# EAGLE board LaunchPadSpiBus (EAGLE 6.4)
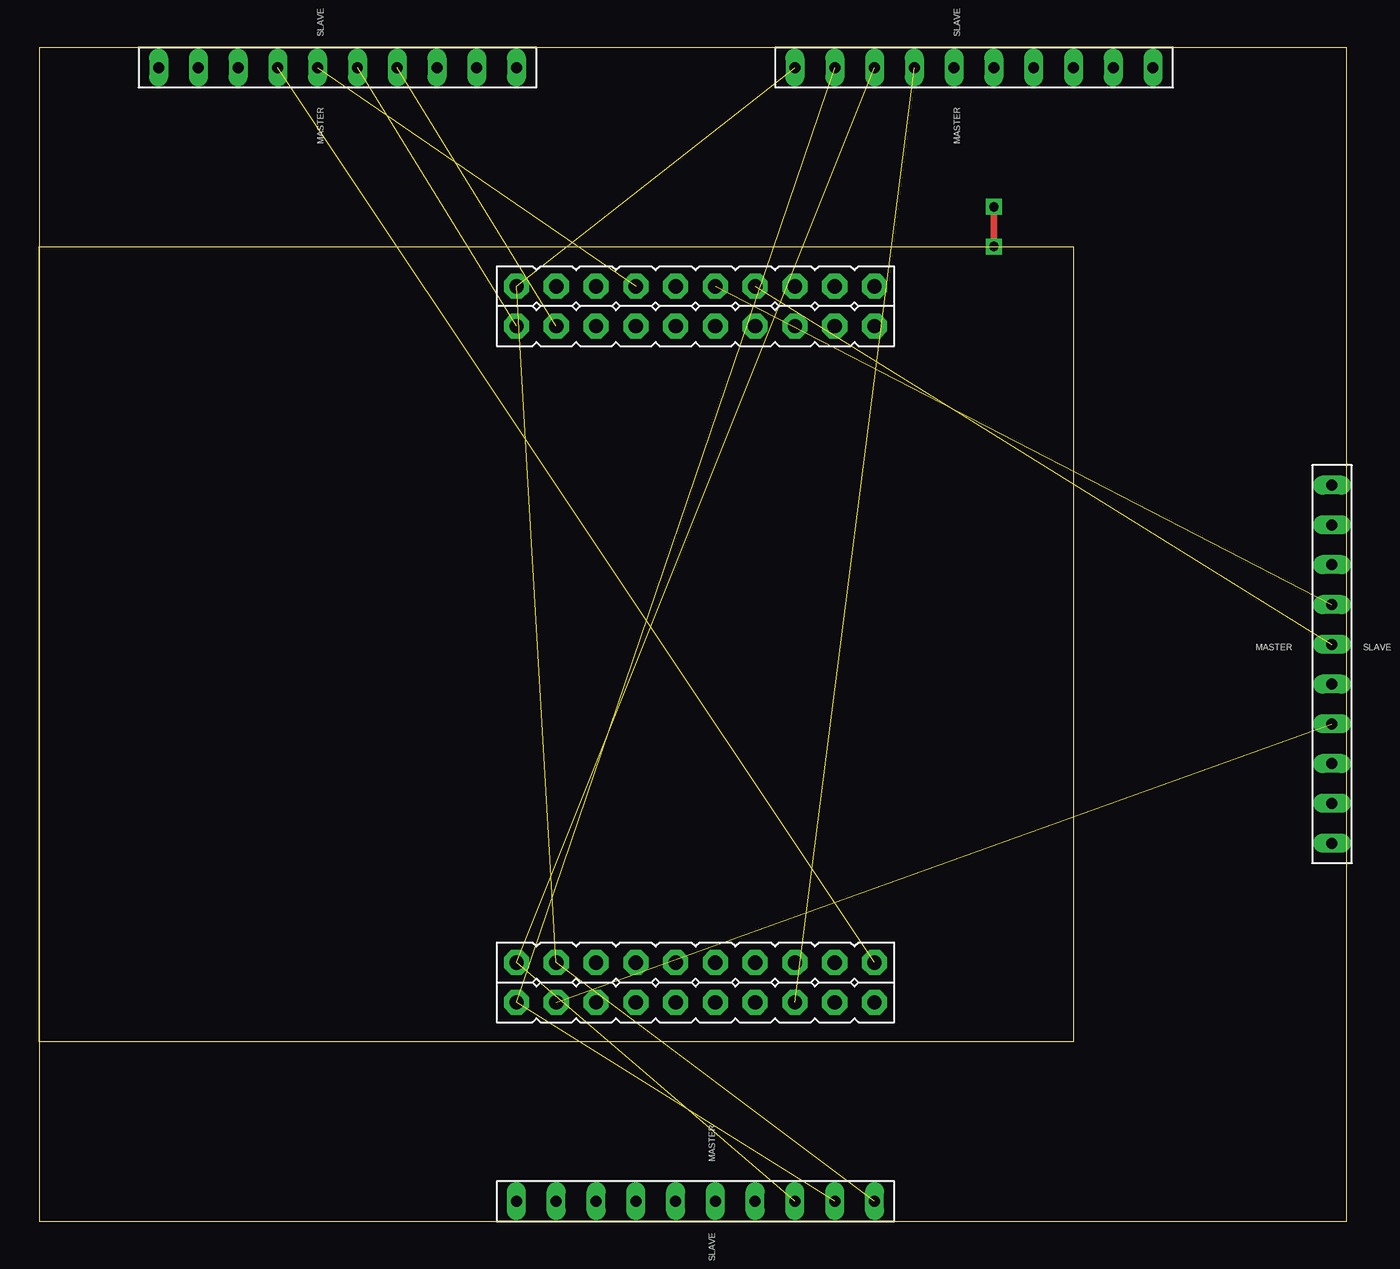
[diagram p0: board, top side]
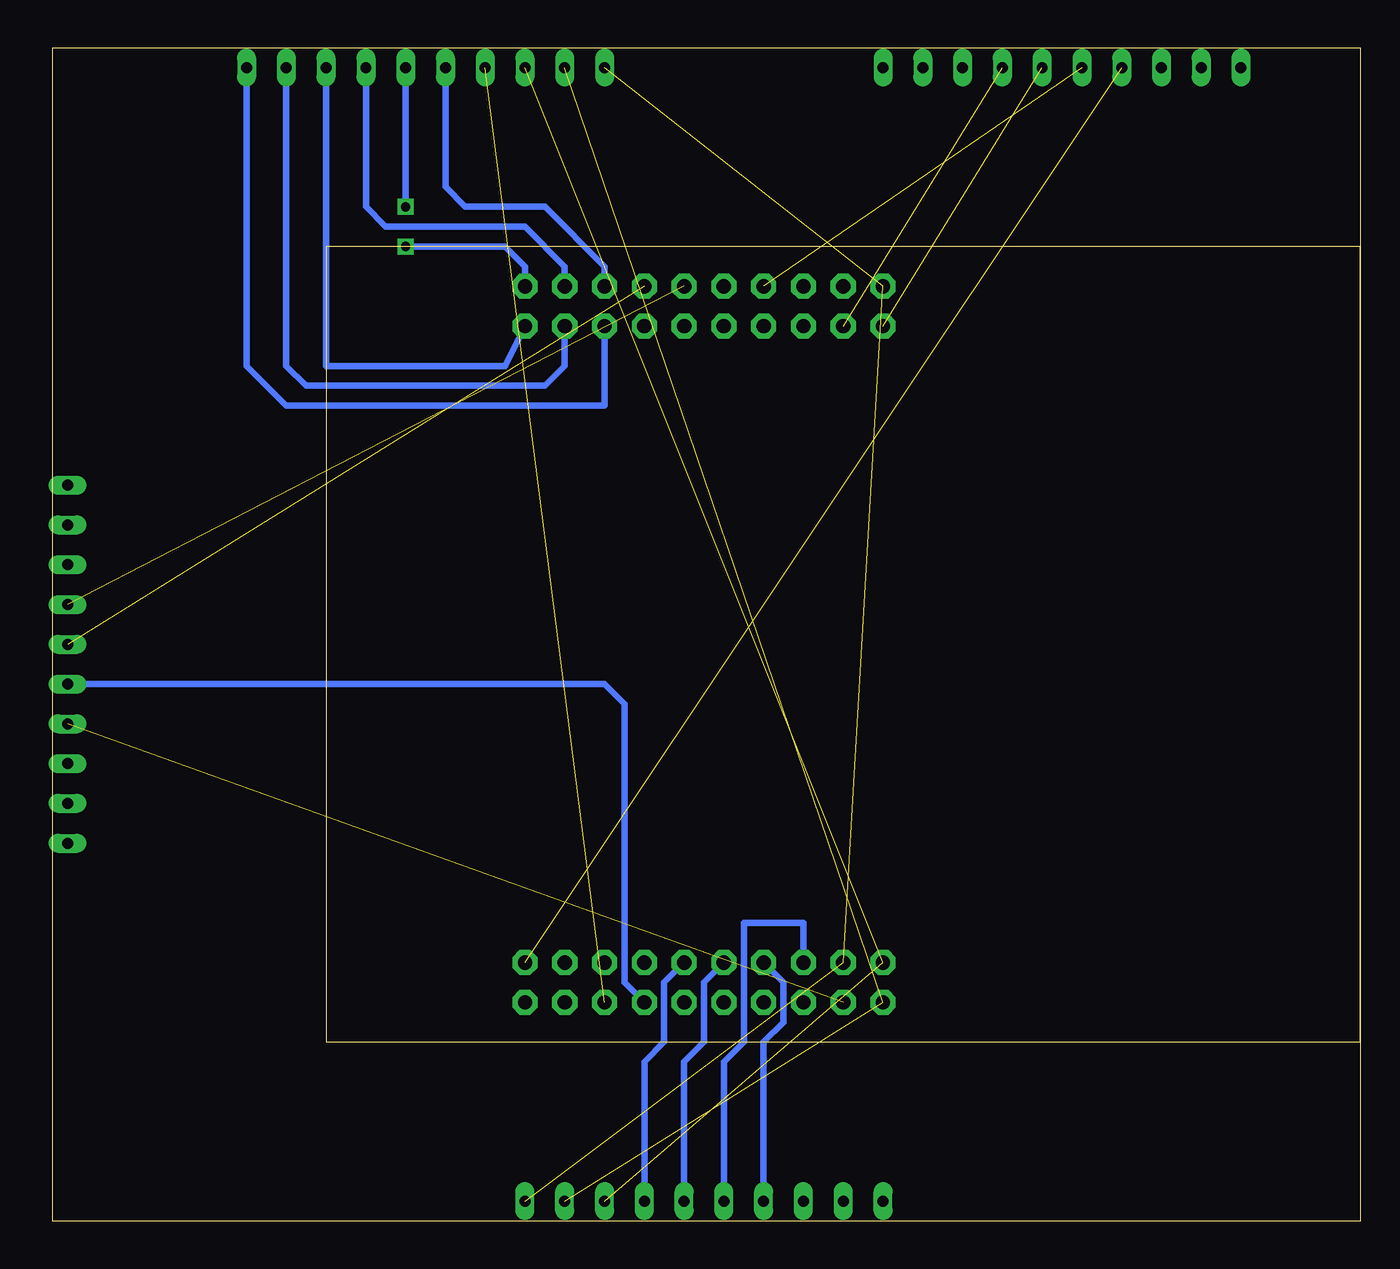
[diagram p1: board, bottom side, seen from below]

Size 83.49 x 74.92 mm. Coordinates in mm from the lower left corner, seen from the top.
Outline: 0,0 83.49,0 83.49,74.92 0,74.92 0,0
Copper layers (1*16): Top 0.035mm / dielectric 1.5mm / Bottom 0.035mm
Design rules "default": minimum track width 10mil, minimum drill 24mil, track to track 8mil, track to pad 8mil, pad to pad 8mil, via to via 8mil, smd to smd 8mil, copper to edge 40mil, drill to drill 8mil, minimum pad ring 10mil, minimum via ring 8mil, stop-mask expansion 4mil, vias tented up to drill 0mil, thermal gap 10mil

## Footprints (pad centres in the part's own frame; a part is rotated, then mirrored left to right if it is on the bottom)
LAUNCHPAD-XL = drill 0.914 pad 1.6 octagon: 3.3V 30.48,2.54; GND1 33.02,5.08; GND2 30.48,48.26; PA2 53.34,48.26; PA3 50.8,48.26; PA4 48.26,48.26; PA5 48.26,2.54; PA6 50.8,2.54; PA7 53.34,2.54; PB0 35.56,2.54; PB1 38.1,2.54; PB2 33.02,48.26; PB3 35.56,45.72; PB4 45.72,2.54; PB5 33.02,2.54; PB6 45.72,48.26; PB7 43.18,48.26; PC4 38.1,45.72; PC5 40.64,45.72; PC6 43.18,45.72; PC7 45.72,45.72; PD0 35.56,5.08; PD1 38.1,5.08; PD2 40.64,5.08; PD3 43.18,5.08; PD6 48.26,45.72; PD7 50.8,45.72; PE0 35.56,48.26; PE1 45.72,5.08; PE2 48.26,5.08; PE3 50.8,5.08; PE4 40.64,2.54; PE5 43.18,2.54; PF0 38.1,48.26; PF1 53.34,5.08; PF2 30.48,45.72; PF3 33.02,45.72; PF4 53.34,45.72; RST 40.64,48.26; VBUS 30.48,5.08
SPI_BUS = drill 0.7 long: +3V3 0,2.54; +5V 0,5.08; CS 0,15.24; GND 0,0; GPIO 0,22.86; INT 0,17.78; MISO 0,10.16; MOSI 0,7.62; RST 0,20.32; SCK 0,12.7

## Placement (x,y rotation side)
U$1  STELLARIS-LAUNCHPADSTELLARIS-LAUNCHPAD-XL  [LAUNCHPAD-XL]  0,11.43 0 top
U$2  SPI_BUS  [SPI_BUS]  48.26,73.66 270 top
U$3  SPI_BUS  [SPI_BUS]  53.34,1.27 90 top
U$4  SPI_BUS  [SPI_BUS]  7.62,73.66 270 top
U$5  SPI_BUS  [SPI_BUS]  82.55,46.99 180 top

## Library data of the parts
U$1 = StellarisLaunchPad_Fred
U$2-U$5 = lieven

## Nets
N$1: U$1.PA3 U$2.CS
N$2: U$1.PE4
N$3: U$1.PB0
N$4: U$1.PB1
N$5: U$1.PD0 U$3.SCK
N$6: U$1.PD1 U$3.CS
N$7: U$1.VBUS U$2.+5V U$3.+5V
N$8: U$1.PA2 U$2.SCK
N$9: U$1.GND1 U$1.GND2 U$2.GND U$3.GND
N$10: U$1.3.3V U$2.+3V3 U$3.+3V3
N$11: U$1.PB5 U$5.CS
N$12: U$1.PA5 U$2.MOSI
N$13: U$1.PE0
N$14: U$1.PB4 U$5.SCK
N$15: U$1.PB7 U$5.MOSI
N$16: U$1.PB6 U$5.MISO
N$17: U$1.PA4 U$2.MISO
N$18: U$1.PF4 U$2.INT
N$19: U$1.PD7 U$2.RST
N$20: U$1.PD6 U$2.GPIO
N$21: U$1.PD2 U$3.MISO
N$22: U$1.PD3 U$3.MOSI
N$23: U$1.PF1 U$4.MOSI
N$24: U$1.PF0 U$4.MISO
N$25: U$1.PF2 U$4.SCK
N$26: U$1.PF3 U$4.CS
RST: U$1.RST

## Tracks (layer width: path | path; a pad name or v marks a point on that pad's centre or on a via)
N$1
  Bottom 0.406: U$1.PA3 50.8,60.96 53.34,63.5 62.23,63.5 63.5,64.77 U$2.CS
N$5
  Bottom 0.406: U$3.SCK 40.64,10.16 39.37,11.43 39.37,19.05 35.56,19.05 U$1.PD0
N$6
  Bottom 0.406: U$3.CS 38.1,11.43 36.83,12.7 36.83,15.24 U$1.PD1
N$7  (2 unrouted)
N$8  (via drill 0.6)
  Top 0.406: v60.96,62.23 v60.96,64.77
  Bottom 0.406: U$1.PA2 53.34,60.96 54.61,62.23 v60.96,62.23 | v60.96,64.77 U$2.SCK
N$9  (3 unrouted)
N$10  (2 unrouted)
N$11  (1 unrouted)
N$12  (1 unrouted)
N$14
  Bottom 0.406: U$1.PB4 46.99,15.24 46.99,33.02 48.26,34.29 U$5.SCK
N$15  (1 unrouted)
N$16  (1 unrouted)
N$17
  Bottom 0.406: U$1.PA4 48.26,60.96 52.07,64.77 57.15,64.77 58.42,66.04 U$2.MISO
N$18
  Bottom 0.406: U$1.PF4 54.61,54.61 66.04,54.61 U$2.INT
N$19
  Bottom 0.406: U$1.PD7 50.8,54.61 52.07,53.34 67.31,53.34 68.58,54.61 U$2.RST
N$20
  Bottom 0.406: U$2.GPIO 71.12,54.61 68.58,52.07 48.26,52.07 U$1.PD6
N$21
  Bottom 0.406: U$3.MISO 43.18,10.16 41.91,11.43 41.91,15.24 U$1.PD2
N$22
  Bottom 0.406: U$1.PD3 44.45,15.24 44.45,11.43 45.72,10.16 U$3.MOSI
N$23  (1 unrouted)
N$24  (1 unrouted)
N$25  (1 unrouted)
N$26  (1 unrouted)